# EAGLE board pmod_debug (EAGLE 6.4.4)
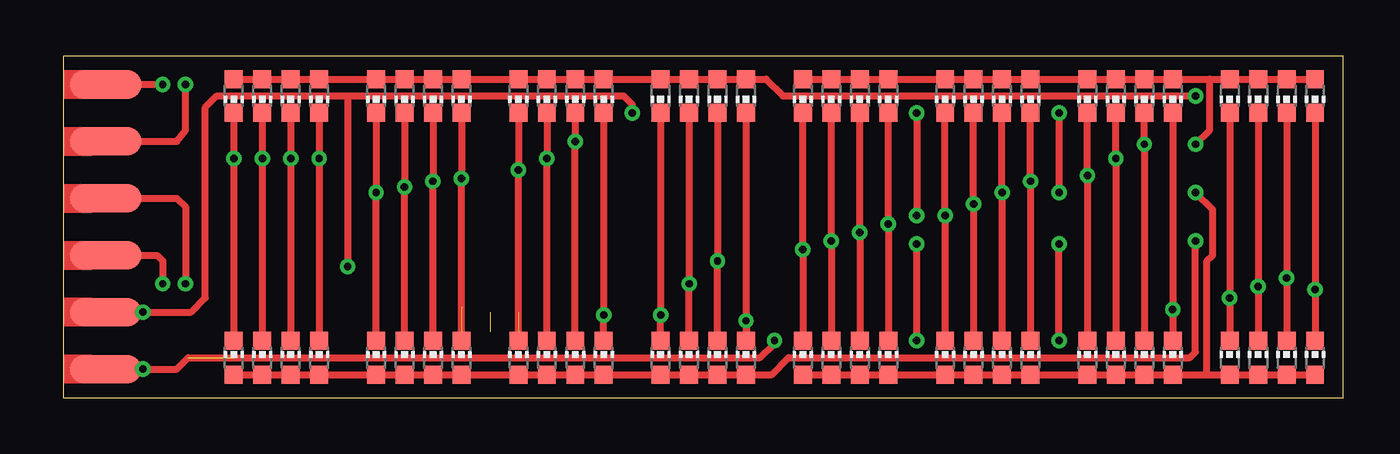
[diagram p0: board, top side]
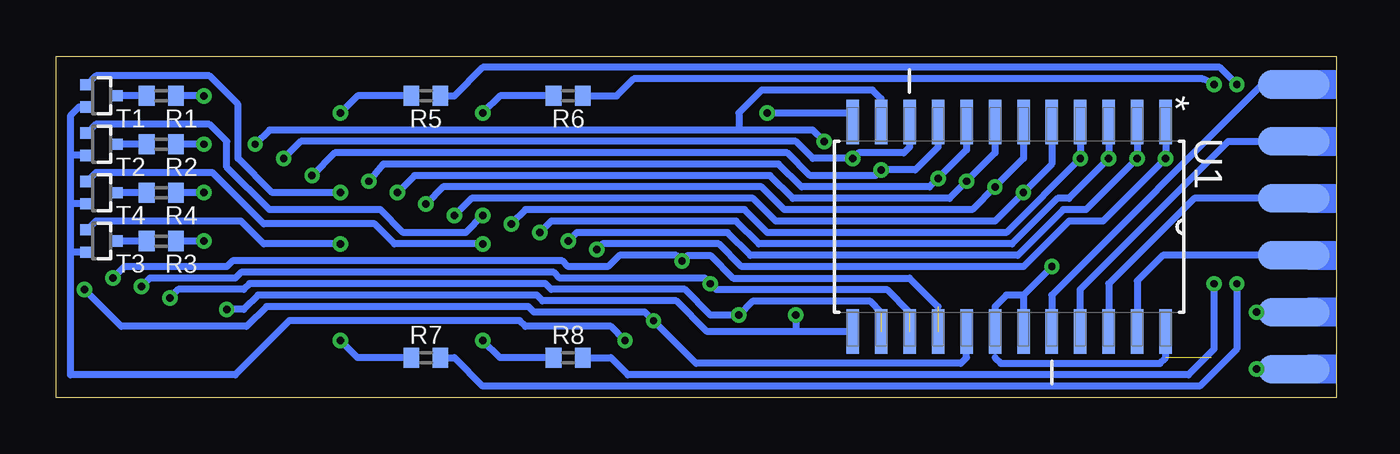
[diagram p1: board, bottom side, seen from below]

Size 57.15 x 15.24 mm. Coordinates in mm from the lower left corner, seen from the top.
Outline: 0,0 57.15,0 57.15,15.24 0,15.24 0,0
Copper layers (1*16): Top 0.0356mm / dielectric 1.5011mm / Bottom 0.0356mm
Design rules "LaenPCBOrder *": minimum track width 6mil, minimum drill 13mil, track to track 6mil, track to pad 6mil, pad to pad 6mil, via to via 6mil, smd to smd 6mil, copper to edge 15mil, drill to drill 6mil, minimum pad ring 7mil, minimum via ring 7mil, stop-mask expansion 4mil, vias tented up to drill 15mil, thermal gap 10mil

## Footprints (pad centres in the part's own frame; a part is rotated, then mirrored left to right if it is on the bottom)
CHIP-LED0603 = smd 0.8 x 0.8: A 0,-0.75; C 0,0.75
SMD1.27-3.175HR = smd 1.27 x 3.175: 1 0,0
R0402 = smd 0.7 x 0.9: 1 -0.65,0; 2 0.65,0
SOT416 = smd 0.5 x 0.6: 1 -0.5,-0.65; 2 0.5,-0.65; 3 0,0.65
SOIC127P1030X265-24N = smd 1.981 x 0.559: 1 -4.674,6.985; 2 -4.674,5.715; 3 -4.674,4.445; 4 -4.674,3.175; 5 -4.674,1.905; 6 -4.674,0.635; 7 -4.674,-0.635; 8 -4.674,-1.905; 9 -4.674,-3.175; 10 -4.674,-4.445; 11 -4.674,-5.715; 12 -4.674,-6.985; 13 4.674,-6.985; 14 4.674,-5.715; 15 4.674,-4.445; 16 4.674,-3.175; 17 4.674,-1.905; 18 4.674,-0.635; 19 4.674,0.635; 20 4.674,1.905; 21 4.674,3.175; 22 4.674,4.445; 23 4.674,5.715; 24 4.674,6.985

## Placement (x,y rotation side)
LED1  [CHIP-LED0603]  7.62,13.46 180 top
LED2  [CHIP-LED0603]  8.89,13.46 180 top
LED3  [CHIP-LED0603]  10.16,13.46 180 top
LED4  [CHIP-LED0603]  11.43,13.46 180 top
LED5  [CHIP-LED0603]  13.97,13.46 180 top
LED6  [CHIP-LED0603]  15.24,13.46 180 top
LED7  [CHIP-LED0603]  16.51,13.46 180 top
LED8  [CHIP-LED0603]  17.78,13.46 180 top
LED9  [CHIP-LED0603]  20.32,13.46 180 top
LED10  [CHIP-LED0603]  21.59,13.46 180 top
LED11  [CHIP-LED0603]  22.86,13.46 180 top
LED12  [CHIP-LED0603]  24.13,13.46 180 top
LED13  [CHIP-LED0603]  26.67,13.46 180 top
LED14  [CHIP-LED0603]  27.94,13.46 180 top
LED15  [CHIP-LED0603]  29.21,13.46 180 top
LED16  [CHIP-LED0603]  30.48,13.46 180 top
LED17  [CHIP-LED0603]  33.02,13.46 180 top
LED18  [CHIP-LED0603]  34.29,13.46 180 top
LED19  [CHIP-LED0603]  35.56,13.46 180 top
LED20  [CHIP-LED0603]  36.83,13.46 180 top
LED21  [CHIP-LED0603]  39.37,13.46 180 top
LED22  [CHIP-LED0603]  40.64,13.46 180 top
LED23  [CHIP-LED0603]  41.91,13.46 180 top
LED24  [CHIP-LED0603]  43.18,13.46 180 top
LED25  [CHIP-LED0603]  45.72,13.46 180 top
LED26  [CHIP-LED0603]  46.99,13.46 180 top
LED27  [CHIP-LED0603]  48.26,13.46 180 top
LED28  [CHIP-LED0603]  49.53,13.46 180 top
LED29  [CHIP-LED0603]  52.07,13.46 180 top
LED30  [CHIP-LED0603]  53.34,13.46 180 top
LED31  [CHIP-LED0603]  54.61,13.46 180 top
LED32  [CHIP-LED0603]  55.88,13.46 180 top
LED33  [CHIP-LED0603]  7.62,1.78 0 top
LED34  [CHIP-LED0603]  8.89,1.78 0 top
LED35  [CHIP-LED0603]  10.16,1.78 0 top
LED36  [CHIP-LED0603]  11.43,1.78 0 top
LED37  [CHIP-LED0603]  13.97,1.78 0 top
LED38  [CHIP-LED0603]  15.24,1.78 0 top
LED39  [CHIP-LED0603]  16.51,1.78 0 top
LED40  [CHIP-LED0603]  17.78,1.78 0 top
LED41  [CHIP-LED0603]  20.32,1.78 0 top
LED42  [CHIP-LED0603]  21.59,1.78 0 top
LED43  [CHIP-LED0603]  22.86,1.78 0 top
LED44  [CHIP-LED0603]  24.13,1.78 0 top
LED45  [CHIP-LED0603]  26.67,1.78 0 top
LED46  [CHIP-LED0603]  27.94,1.78 0 top
LED47  [CHIP-LED0603]  29.21,1.78 0 top
LED48  [CHIP-LED0603]  30.48,1.78 0 top
LED49  [CHIP-LED0603]  33.02,1.78 0 top
LED50  [CHIP-LED0603]  34.29,1.78 0 top
LED51  [CHIP-LED0603]  35.56,1.78 0 top
LED52  [CHIP-LED0603]  36.83,1.78 0 top
LED53  [CHIP-LED0603]  39.37,1.78 0 top
LED54  [CHIP-LED0603]  40.64,1.78 0 top
LED55  [CHIP-LED0603]  41.91,1.78 0 top
LED56  [CHIP-LED0603]  43.18,1.78 0 top
LED57  [CHIP-LED0603]  45.72,1.78 0 top
LED58  [CHIP-LED0603]  46.99,1.78 0 top
LED59  [CHIP-LED0603]  48.26,1.78 0 top
LED60  [CHIP-LED0603]  49.53,1.78 0 top
LED61  [CHIP-LED0603]  52.07,1.78 0 top
LED62  [CHIP-LED0603]  53.34,1.78 0 top
LED63  [CHIP-LED0603]  54.61,1.78 0 top
LED64  [CHIP-LED0603]  55.88,1.78 0 top
PAD1  [SMD1.27-3.175HR]  1.91,13.97 270 top
PAD2  [SMD1.27-3.175HR]  1.91,11.43 270 top
PAD3  [SMD1.27-3.175HR]  1.91,8.89 270 top
PAD4  [SMD1.27-3.175HR]  1.91,6.35 270 top
PAD5  [SMD1.27-3.175HR]  1.91,3.81 270 top
PAD6  [SMD1.27-3.175HR]  1.91,1.27 270 top
PAD7  [SMD1.27-3.175HR]  1.91,13.97 90 bottom
PAD8  [SMD1.27-3.175HR]  1.91,11.43 90 bottom
PAD9  [SMD1.27-3.175HR]  1.91,8.89 90 bottom
PAD10  [SMD1.27-3.175HR]  1.91,6.35 90 bottom
PAD11  [SMD1.27-3.175HR]  1.91,3.81 90 bottom
PAD12  [SMD1.27-3.175HR]  1.91,1.27 90 bottom
R1  560R  [R0402]  52.45,13.46 180 bottom
R2  560R  [R0402]  52.45,11.3 180 bottom
R3  560R  [R0402]  52.45,6.99 180 bottom
R4  560R  [R0402]  52.45,9.14 180 bottom
R5  220R  [R0402]  40.64,13.46 0 bottom
R6  220R  [R0402]  34.29,13.46 0 bottom
R7  220R  [R0402]  40.64,1.78 0 bottom
R8  220R  [R0402]  34.29,1.78 0 bottom
T1  BSS84AKT  [SOT416]  55.12,13.46 270 bottom
T2  BSS84AKT  [SOT416]  55.12,11.3 270 bottom
T3  BSS84AKT  [SOT416]  55.12,6.99 270 bottom
T4  BSS84AKT  [SOT416]  55.12,9.14 270 bottom
U1  CD74HC154M  [SOIC127P1030X265-24N]  14.61,7.62 270 bottom

## Library data of the parts
LED1-LED64 = led
PAD1-PAD12 = wirepad
R1-R8 = rcl
T1-T4 = nxp_60
U1 = 74hc154; MPN: CD74HC154M; OC_FARNELL: 1640550; OC_NEWARK: 66F5185; PACKAGE: SOIC-24; SUPPLIER: Texas Instruments

## Nets
+3V3: PAD6.1 PAD12.1 T1.2 T2.2 T3.2 T4.2 U1.24
C0: LED1.C LED17.C LED33.C LED49.C U1.1
C1: LED2.C LED18.C LED34.C LED50.C U1.2
C2: LED3.C LED19.C LED35.C LED51.C U1.3
C3: LED4.C LED20.C LED36.C LED52.C U1.4
C4: LED5.C LED21.C LED37.C LED53.C U1.5
C5: LED6.C LED22.C LED38.C LED54.C U1.6
C6: LED7.C LED23.C LED39.C LED55.C U1.7
C7: LED8.C LED24.C LED40.C LED56.C U1.8
C8: LED9.C LED25.C LED41.C LED57.C U1.9
C9: LED10.C LED26.C LED42.C LED58.C U1.10
C10: LED11.C LED27.C LED43.C LED59.C U1.11
C11: LED12.C LED28.C LED44.C LED60.C U1.13
C12: LED13.C LED29.C LED45.C LED61.C U1.14
C13: LED14.C LED30.C LED46.C LED62.C U1.15
C14: LED15.C LED31.C LED47.C LED63.C U1.16
C15: LED16.C LED32.C LED48.C LED64.C U1.17
GND: PAD5.1 PAD11.1 U1.12 U1.18 U1.19
N$1: LED1.A LED2.A LED3.A LED4.A LED5.A LED6.A LED7.A LED8.A LED9.A LED10.A LED11.A LED12.A LED13.A LED14.A LED15.A LED16.A R1.1
N$2: LED17.A LED18.A LED19.A LED20.A LED21.A LED22.A LED23.A LED24.A LED25.A LED26.A LED27.A LED28.A LED29.A LED30.A LED31.A LED32.A R2.1
N$3: LED33.A LED34.A LED35.A LED36.A LED37.A LED38.A LED39.A LED40.A LED41.A LED42.A LED43.A LED44.A LED45.A LED46.A LED47.A LED48.A R3.1
N$4: LED49.A LED50.A LED51.A LED52.A LED53.A LED54.A LED55.A LED56.A LED57.A LED58.A LED59.A LED60.A LED61.A LED62.A LED63.A LED64.A R4.1
N$5: R4.2 T4.3
N$6: R3.2 T3.3
N$7: R1.2 T1.3
N$8: R2.2 T2.3
N$9: R8.1 T4.1
N$10: R7.1 T3.1
N$11: R5.1 T1.1
N$12: R6.1 T2.1
N$13: PAD10.1 U1.23
N$14: PAD9.1 U1.22
N$15: PAD8.1 U1.21
N$16: PAD7.1 U1.20
N$17: PAD1.1 R5.2
N$18: PAD2.1 R6.2
N$19: PAD3.1 R8.2
N$20: PAD4.1 R7.2

## Tracks (layer width: path | path; a pad name or v marks a point on that pad's centre or on a via)
+3V3  (via drill 0.33)  (1 unrouted)
  Top 0.305: PAD12.1 v3.56,1.27 5.08,1.27 5.59,1.78 31.11,1.78 31.75,2.41 v31.75,2.54
  Bottom 0.305: 15.24,1.78 14.99,1.52 13.97,1.52 7.87,1.52 7.62,1.78 U1.24 | v3.56,1.27 PAD12.1 | T2.2 56.51,10.8 56.52,10.79 | T1.2 56.13,12.96 56.52,12.57 56.52,10.79 | 56.52,10.79 56.52,8.64 | 56.52,8.64 56.52,6.49 | 56.52,6.49 56.52,1.02 49.15,1.02 46.74,3.43 36.45,3.43 36.2,3.17 32.38,3.17 v31.75,2.54 | T4.2 56.52,8.64 | T3.2 56.52,6.49
C0  (via drill 0.33)
  Top 0.305: LED1.C v7.62,10.67 LED33.C | LED17.C v33.02,6.6 LED49.C
  Bottom 0.305: v33.02,6.6 32.77,6.86 27.56,6.86 26.54,5.84 13.97,5.84 11.94,7.87 10.41,7.87 v7.62,10.67 U1.1
C1  (via drill 0.33)
  Top 0.305: LED2.C v8.89,10.67 LED34.C | LED18.C v34.29,6.99 LED50.C
  Bottom 0.305: v34.29,6.99 33.91,7.37 27.18,7.37 26.16,6.35 14.22,6.35 12.19,8.38 11.18,8.38 v8.89,10.67 U1.2
C2  (via drill 0.33)
  Top 0.305: LED3.C v10.16,10.67 LED35.C | LED19.C v35.56,7.37 LED51.C
  Bottom 0.305: v35.56,7.37 35.05,7.87 26.8,7.87 25.78,6.86 14.48,6.86 12.45,8.89 11.94,8.89 v10.16,10.67 U1.3
C3  (via drill 0.33)
  Top 0.305: LED4.C v11.43,10.67 LED36.C | LED20.C v36.83,7.75 LED52.C
  Bottom 0.305: v36.83,7.75 36.2,8.38 26.42,8.38 25.4,7.37 14.73,7.37 v11.43,10.67 U1.4
C4  (via drill 0.33)
  Top 0.305: LED5.C v13.97,9.14 LED37.C | LED21.C v39.37,8.13 LED53.C
  Bottom 0.305: v39.37,8.13 38.61,8.89 26.04,8.89 25.02,7.87 15.24,7.87 v13.97,9.14 12.7,10.41 U1.5
C5  (via drill 0.33)
  Top 0.305: LED6.C v15.24,9.4 LED38.C | LED22.C v40.64,8.64 LED54.C
  Bottom 0.305: v40.64,8.64 39.88,9.4 25.65,9.4 24.64,8.38 16.26,8.38 v15.24,9.4 13.97,10.67 U1.6
C6  (via drill 0.33)
  Top 0.305: LED7.C v16.51,9.65 LED39.C | LED23.C v41.91,9.14 LED55.C
  Bottom 0.305: v41.91,9.14 41.15,9.91 25.27,9.91 24.26,8.89 17.27,8.89 v16.51,9.65 15.24,10.92 U1.7
C7  (via drill 0.33)
  Top 0.305: LED8.C v17.78,9.78 LED40.C | LED24.C v43.18,9.65 LED56.C
  Bottom 0.305: v43.18,9.65 42.55,10.41 24.89,10.41 23.88,9.4 18.16,9.4 v17.78,9.78 16.51,11.05 U1.8
C8  (via drill 0.33)
  Top 0.305: LED9.C v20.32,10.16 LED41.C | LED25.C v45.72,9.91 LED57.C
  Bottom 0.305: v45.72,9.91 44.7,10.92 24.51,10.92 23.5,9.91 20.57,9.91 v20.32,10.16 18.8,10.16 17.78,11.18 U1.9
C9  (via drill 0.33)
  Top 0.305: LED10.C v21.59,10.67 LED42.C | LED26.C v46.99,10.67 LED58.C
  Bottom 0.305: v46.99,10.67 46.23,11.43 24.13,11.43 23.37,10.67 v21.59,10.67 21.34,10.92 19.3,10.92 19.05,11.18 U1.10
C10  (via drill 0.33)
  Top 0.305: LED11.C v22.86,11.43 LED43.C | LED27.C v48.26,11.3 LED59.C
  Bottom 0.305: v22.86,11.43 23.37,11.94 26.67,11.94 | 26.67,11.94 47.62,11.94 v48.26,11.3 | U1.11 20.32,13.34 20.7,13.72 25.65,13.72 26.67,12.7 26.67,11.94
C11  (via drill 0.33)
  Top 0.305: LED12.C v24.13,3.68 LED44.C | LED28.C v49.53,3.94 LED60.C
  Bottom 0.305: 24.26,3.56 v24.13,3.68 24.13,2.95 | v49.53,3.94 48.77,3.94 48.13,4.57 35.69,4.57 35.43,4.32 29.46,4.32 28.09,2.95 24.13,2.95 | U1.13 24.13,2.95
C12  (via drill 0.33)  (1 unrouted)
  Top 0.305: LED45.C v26.67,3.68 LED13.C | LED61.C v52.07,4.45 LED29.C
  Bottom 0.305: 20.32,3.81 20.83,4.32 26.04,4.32 v26.67,3.68 27.94,3.68 29.08,4.83 35.05,4.83 35.31,5.08 48.51,5.08 48.77,4.83 51.69,4.83 v52.07,4.45
C13  (via drill 0.33)  (1 unrouted)
  Top 0.305: LED46.C v27.94,5.08 LED14.C | LED62.C v53.34,4.95 LED30.C
  Bottom 0.305: 19.05,3.81 20.07,4.83 27.69,4.83 v27.94,5.08 28.19,5.33 34.67,5.33 34.92,5.59 48.9,5.59 49.15,5.33 52.96,5.33 v53.34,4.95
C14  (via drill 0.33)  (1 unrouted)
  Top 0.305: LED47.C v29.21,6.1 LED15.C | LED63.C v54.61,5.33 LED31.C
  Bottom 0.305: 17.78,4.06 19.05,5.33 26.92,5.33 27.94,6.35 28.96,6.35 v29.21,6.1 29.46,6.35 32,6.35 32.51,5.84 34.29,5.84 34.54,6.1 49.28,6.1 49.53,5.84 54.1,5.84 v54.61,5.33
C15  (via drill 0.33)
  Top 0.305: LED16.C v30.48,3.43 | v30.48,3.43 LED48.C 30.49,3.3 30.48,3.31 v30.48,3.43 | LED32.C v55.88,4.83 LED64.C
  Bottom 0.305: v55.88,4.83 54.23,3.17 48.64,3.17 47.75,4.06 36.07,4.06 35.81,3.81 30.86,3.81 v30.48,3.43 28.57,1.52 16.76,1.52 16.51,1.78 U1.17
GND  (via drill 0.33)
  Top 0.305: PAD11.1 v3.56,3.81 5.71,3.81 6.35,4.45 6.35,12.95 6.86,13.46 12.7,13.46 | 12.7,13.46 25.02,13.46 25.4,13.08 v25.4,12.7 | 12.7,13.46 v12.7,5.84
  Bottom 0.305: v3.56,3.81 PAD11.1 | v25.4,12.7 21.59,12.7 U1.12 | v12.7,5.84 13.97,4.57 | 13.97,4.57 U1.19 | 13.97,4.57 14.73,4.57 15.24,4.06 U1.18
N$1  (via drill 0.33)
  Top 0.305: v50.55,13.46 32.13,13.46 31.38,14.21 LED16.A LED15.A LED14.A LED13.A LED12.A LED11.A LED10.A LED9.A LED8.A LED7.A LED6.A LED5.A LED4.A LED3.A LED1.A LED2.A
  Bottom 0.305: v50.55,13.46 R1.1
N$2  (via drill 0.33)
  Top 0.305: LED32.A LED31.A LED30.A LED29.A 51.18,14.21 | LED20.A LED19.A LED18.A LED17.A LED21.A LED22.A LED23.A LED24.A LED25.A LED26.A LED27.A LED28.A 51.18,14.21 | v50.55,11.3 51.18,11.94 51.18,14.21
  Bottom 0.305: v50.55,11.3 R2.1
N$3  (via drill 0.33)
  Top 0.305: v50.55,6.99 50.55,2.03 50.29,1.78 32.38,1.78 31.64,1.03 LED48.A LED47.A LED46.A LED45.A LED44.A LED43.A LED42.A LED41.A LED40.A LED39.A LED38.A LED37.A LED36.A LED35.A LED34.A LED33.A
  Bottom 0.305: v50.55,6.99 R3.1
N$4  (via drill 0.33)
  Top 0.305: LED61.A 51.05,1.03 51.05,6.1 51.31,6.35 51.31,8.38 v50.55,9.14 | LED51.A LED50.A LED49.A LED52.A LED53.A LED54.A LED55.A LED56.A LED57.A LED58.A LED59.A LED60.A LED61.A | LED61.A LED62.A LED63.A LED64.A
  Bottom 0.305: v50.55,9.14 R4.1
N$5
  Bottom 0.305: R4.2 T4.3
N$6
  Bottom 0.305: R3.2 T3.3
N$7
  Bottom 0.305: R1.2 T1.3
N$8
  Bottom 0.305: R2.2 T2.3
N$9  (via drill 0.33)
  Top 0.305: v38.1,2.54 v38.1,6.86
  Bottom 0.305: R8.1 37.34,1.78 v38.1,2.54 | v38.1,6.86 42.04,6.86 42.93,7.75 47.88,7.75 50.16,10.03 55.37,10.03 T4.1
N$10  (via drill 0.33)
  Top 0.305: v44.45,2.54 v44.45,6.86
  Bottom 0.305: R7.1 43.69,1.78 v44.45,2.54 | v44.45,6.86 47.88,6.86 48.9,7.87 55.37,7.87 T3.1
N$11  (via drill 0.33)
  Top 0.305: v44.45,12.7 v44.45,9.14
  Bottom 0.305: R5.1 43.69,13.46 v44.45,12.7 | v44.45,9.14 47.5,9.14 49.02,10.67 49.02,13.08 50.29,14.35 55.37,14.35 T1.1
N$12  (via drill 0.33)
  Top 0.305: v38.1,12.7 v38.1,8.13
  Bottom 0.305: R6.1 37.34,13.46 v38.1,12.7 | v38.1,8.13 38.86,7.37 41.66,7.37 42.67,8.38 47.62,8.38 49.53,10.29 49.53,11.43 50.29,12.19 55.37,12.19 T2.1
N$13
  Bottom 0.305: PAD10.1 7.75,6.35 8.89,5.21 U1.23
N$14
  Bottom 0.305: PAD9.1 6.35,8.89 10.16,5.08 U1.22
N$15
  Bottom 0.305: U1.21 11.43,4.83 4.83,11.43 PAD8.1
N$16
  Bottom 0.305: PAD7.1 3.3,13.97 12.7,4.57 U1.20
N$17  (via drill 0.33)
  Top 0.305: PAD1.1 v4.45,13.97
  Bottom 0.305: v4.45,13.97 5.21,14.73 38.1,14.73 39.37,13.46 R5.2
N$18  (via drill 0.33)
  Top 0.305: PAD2.1 5.08,11.43 5.46,11.94 v5.46,13.97
  Bottom 0.305: v5.46,13.97 5.97,14.22 31.37,14.22 32.13,13.46 R6.2
N$19  (via drill 0.33)
  Top 0.305: PAD3.1 5.08,8.89 5.46,8.51 v5.46,5.08
  Bottom 0.305: v5.46,5.08 5.46,2.16 6.6,1.02 31.62,1.02 32.38,1.78 R8.2
N$20  (via drill 0.33)
  Top 0.305: PAD4.1 4.19,6.35 4.45,6.1 v4.45,5.08
  Bottom 0.305: v4.45,5.08 4.45,2.16 6.1,0.51 38.1,0.51 39.37,1.78 R7.2

## Text on the board
bValues: PMOD Debug V1.0 | Copyright (C) 2013 / H.Poetzl